# Altium PCB SB2232_v01.PcbDoc
Units mm, origin at the board's own origin, x right, y up, seen from the top; angles counter-clockwise.
Board outline 70 x 25 mm, 2 copper layers (Top Layer, Bottom Layer); 40 components, 39 nets, 158 pads, 116 vias.
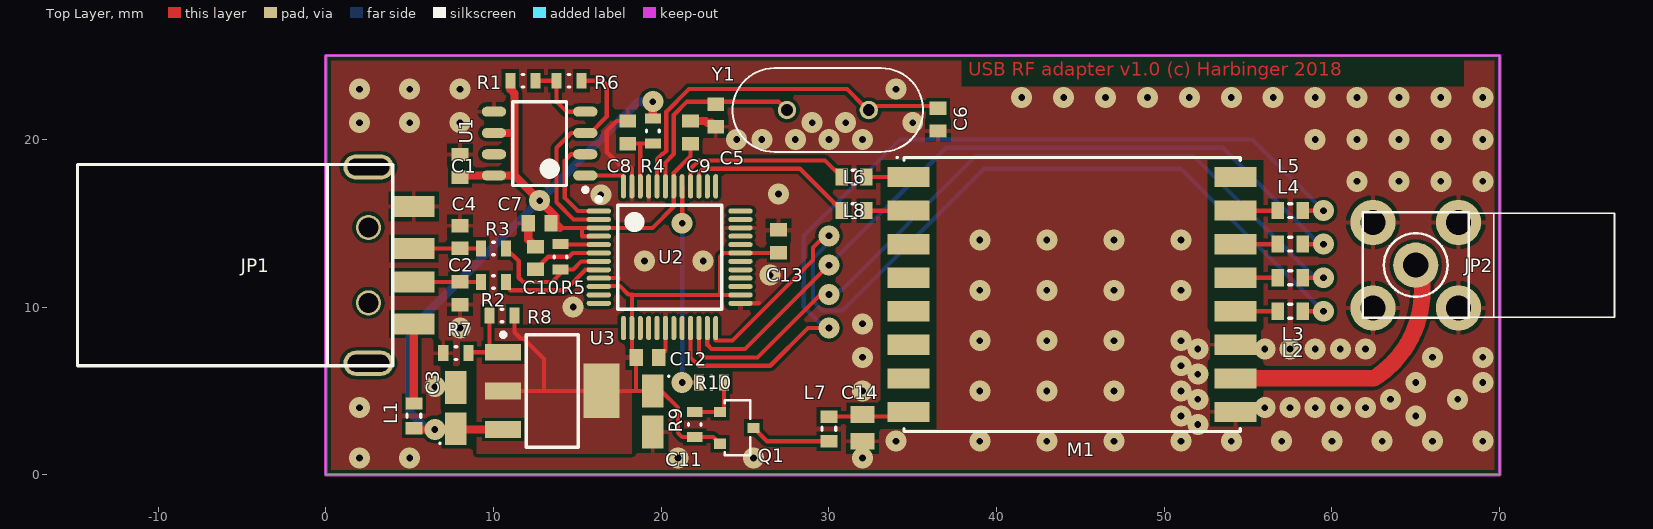
[diagram p0: Top Layer view]
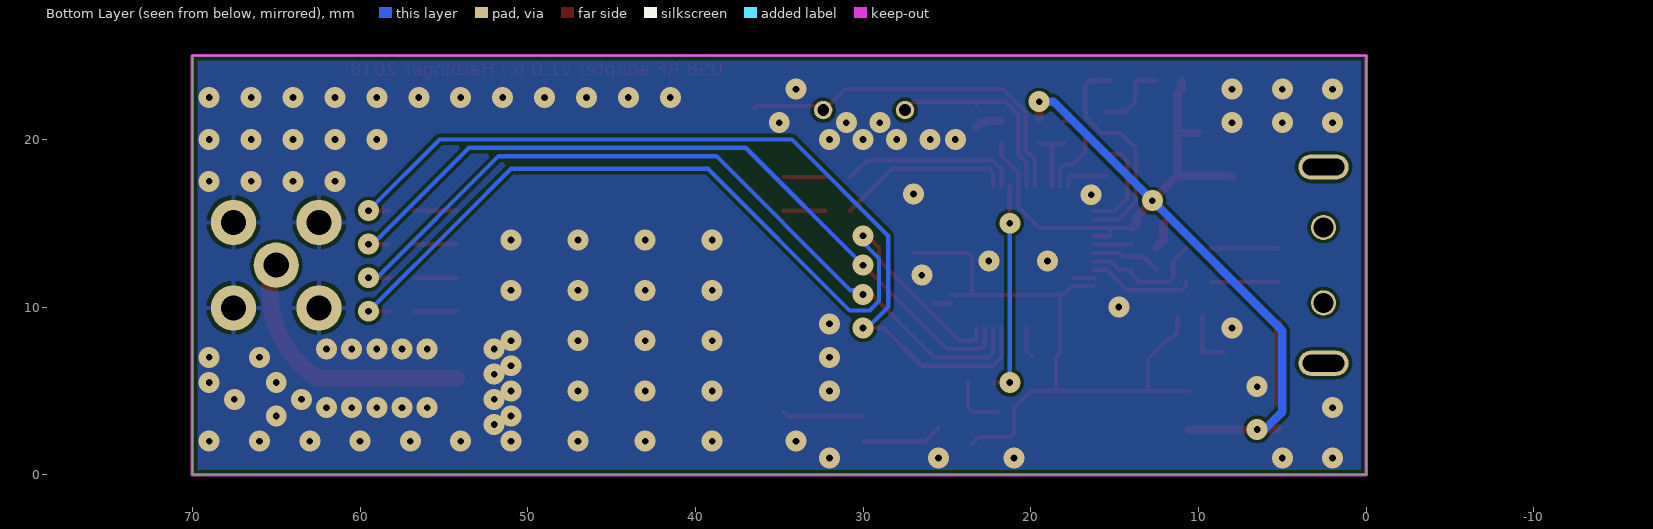
[diagram p1: Bottom Layer view, seen from below]

## Layer stack, top to bottom
Top Solder: solder mask 0.0102, Solder Resist, Dk 3.5
Top Layer: signal copper 0.0356
Dielectric 1: dielectric 0.32, FR-4, Dk 4.8
Bottom Layer: signal copper 0.0356
Bottom Solder: solder mask 0.0102, Solder Resist, Dk 3.5

## Board outline
0,0 0,25 70,25 70,0

## Design rules (kind name [scope] priority, off if disabled: settings)
Clearance Clearance_1 [InNamedPolygon('GND-T1') vs InComponent('M1')] p1: gap=0.4 ignorepadtopadclearanceinfootprint=FALSE
Clearance [All] p2: gap=0.2 ignorepadtopadclearanceinfootprint=FALSE
PolygonConnect PolygonConnect_2 [IsVia vs IsNamedPolygon('GND-T1') Or  IsNamedPolygon('GND-B1')] p1: connectstyle=Direct reliefconductorwidth=0.254 reliefentries=4 polygonreliefangle="90 Angle" airgapwidth=0.254
PolygonConnect PolygonConnect_1 [InComponent('U3') vs IsNamedPolygon('3V3_T')] p2: thpad.connectstyle=Direct thpad.reliefconductorwidth=0.254 thpad.reliefentries=4 thpad.polygonreliefangle="90 Angle" thpad.airgapwidth=0.254 smdpad.connectstyle=Direct smdpad.reliefconductorwidth=0.254 smdpad.reliefentries=4 smdpad.polygonreliefangle="90 Angle" smdpad.airgapwidth=0.254 via.connectstyle=Relief via.reliefconductorwidth=0.254 via.reliefentries=4 via.polygonreliefangle="90 Angle" via.airgapwidth=0.254
PolygonConnect [All] p3: connectstyle=Relief reliefconductorwidth=0.254 reliefentries=4 polygonreliefangle="90 Angle" airgapwidth=0.254
RoutingVias [All] p1: holewidth=0.4 width=0.8 viastyle="Through Hole" minholewidth=0.711 minwidth=1.27 maxholewidth=0.711 maxwidth=1.27
SolderMaskExpansion [All] p1: expansion=0.102
Width [All] p1: maxlimit=3 minlimit=0.2 preferedwidth=0.2
30 further rules are at their usual default settings.

## Components (designator, comment, footprint, x,y, rotation, side; value= is the part's Value field where it differs from the comment)
C1 "100n" CAPC1608X08N 8,18.425 r90 top
C2 "47p" CAPC1608X08N 8,10.825 r270 top
C3 "10u 16V" CAPMP3217X18N 7.75,3.975 r90 top
C4 "47p" CAPC1608X08N 8,14.175 r90 top
C5 "47p" CAPC1608X08N 23.25,21.425 r90 top
C6 "47p" CAPC1608X08N 36.5,21.175 r90 top
C7 "100n" CAPC1608X08N 12.75,15 r180 top
C8 "100n" CAPC1608X08N 18,20.425 r90 top
C9 "100n" CAPC1608X08N 21.75,20.425 r90 top
C10 "47n" CAPC1608X08N 12.5,12.925 r270 top
C11 "10u 16V" CAPMP3217X18N 19.5,3.775 r270 top
C12 "100n" CAPC1608X08N 19.175,7 r0 top
C13 "100n" CAPC1608X08N 27,13.925 r90 top
C14 "10uF" CAPC2012X11N 32,2.8 r270 top
JP1 "USBA-1M" USB_A_M_SMD 5.24,12.5 r90 top locked
JP2 "S-037" S-037_3D 65,12.5 r0 top
L1 "BLM18AG601" INDC1608X10N 5.25,3.515 r270 top
L2 "BLM18AG601" INDC1608X10N 57.515,9.75 r180 top
L3 "BLM18AG601" INDC1608X10N 57.515,11.75 r180 top
L4 "BLM18AG601" INDC1608X10N 57.515,13.75 r180 top
L5 "BLM18AG601" INDC1608X10N 57.515,15.75 r180 top
L6 "BLM18AG601" INDC1608X10N 31.5,17.75 r0 top
L7 "BLM18AG601" INDC1608X10N 30,2.735 r90 top
L8 "BLM18AG601" INDC1608X10N 31.5,15.75 r180 top
M1 "RFM69HW" LGA16_RFM69 44.5,10.75 r0 top
Q1 "IRLML6401" SOT-23 23.5,3.75 r270 top
R1 "10k" RESC1608X06N 11.75,23.5 r180 top
R2 "27" RESC1608X06N 10,11.5 r0 top
R3 "27" RESC1608X06N 10,13.5 r0 top
R4 "470" RESC1608X06N 19.5,20.5 r270 top
R5 "1k5" RESC1608X06N 14,13 r270 top
R6 "2k2" RESC1608X06N 14.5,23.5 r0 top
R7 "0" RESC1608X06N 7.75,7.25 r0 top
R8 "nc" RESC1608X06N 10.5,9.5 r0 top
R9 "10k" RESC1608X06N 22,3 r270 top
R10 "1k" RESC1608X06N 23,5.5 r0 top
U1 "93LC46B" SOIC127P600X175-8N 12.75,19.75 r180 top
U2 "FT2232D" TSQFP50P900X900X160-48N 20.5,12.975 r0 top
U3 "LD1117-3.3" SOT230P700X180-4N 13.5,5 r0 top
Y1 "6MHz" XTAL_HC49P488W45L1117T490H350 29.94,21.75 r180 top

## Footprints (in the part's own frame and the unit in brackets; to place one, negate y for a bottom-side part, rotate by r counter-clockwise, add the part's x,y. Pads: shape width x height; smd on the part's side, far side on the other; paste and mask are expansions set on the pad)
CAPC1608X08N [mm] "Chip Capacitor, 2-Leads, Body 1,60x0,80mm, IPC Medium Density"
  rect 0.8x1 smd: 1(-0.675,0) 2(0.675,0)
  body extent -0.87,-0.48 0.87,0.47, height 0.85
CAPC2012X11N [mm] "Chip Capacitor, 2-Leads, Body 2,00x1,25mm, IPC Medium Density"
  rect 1x1.45 smd: 1(-0.8,0) 2(0.8,0)
  body extent -1.1,-0.72 1.1,0.72, height 1.1
CAPMP3217X18N [mm] "Molded Capacitor, 2-Leads, Body 3,20x1,65mm, IPC Medium Density"
  rect 1.95x1.3 smd: 1(1.225,0) 2(-1.225,0)
  silkscreen extent -2.15,0.9 -2.05,1, body extent -1.7,-0.9 1.7,0.9, height 1.8
INDC1608X10N [mm] "Chip Inductor, 2-Leads, Body 1,60x0,80mm, IPC Medium Density"
  rect 0.74x1.02 smd: 1(-0.735,0) 2(0.735,0)
  silkscreen extent -0.1,-0.41 0.1,0.41, body extent -0.9,-0.5 0.9,0.5, height 1
LGA16_RFM69 [mm] "LGA, 16-Leads, RFM69HW"
  rect 2.5x1.2 smd: 1(-9.75,7) 2(-9.75,5) 3(-9.75,3) 4(-9.75,1) 5(-9.75,-1) 6(-9.75,-3) 7(-9.75,-5) 8(-9.75,-7) 9(9.75,-7) 10(9.75,-5) 11(9.75,-3) 12(9.75,-1) 13(9.75,1) 14(9.75,3) 15(9.75,5) 16(9.75,7)
  silkscreen extent -10.47,-8.17 10.02,8.22, body extent -9.87,-8.03 9.87,8.03, height 2
RESC1608X06N [mm] "Chip Resistor, 2-Leads, Body 1,60x0,82mm, IPC Medium Density"
  rect 0.6x0.95 smd: 1(-0.75,0) 2(0.75,0)
  silkscreen extent -0.05,-0.38 0.05,0.38, body extent -0.85,-0.48 0.85,0.48, height 0.6
S-037_3D [mm]
  round 2.7 hole 1.5: 1(0,0) 2(-2.55,-2.55) 2(-2.55,2.55) 2(2.55,-2.55) 2(2.55,2.55)
  silkscreen extent -3.15,-3.15 11.85,3.15, body extent -2.81,-3.4 9.48,2.9, height 11.5
SOIC127P600X175-8N [mm] "SOIC, 8-Leads, Body 4,90x3,90mm, Pitch 1,27mm, IPC Medium Density"
  oval 1.45x0.6 smd: 1(-2.725,1.905) 2(-2.725,0.635) 3(-2.725,-0.635) 4(-2.725,-1.905) 5(2.725,-1.905) 6(2.725,-0.635) 7(2.725,0.635) 8(2.725,1.905)
  silkscreen extent -2.85,-2.5 1.6,2.88, body extent -3,-2.5 3,2.5, height 1.75
SOT230P700X180-4N [mm] "SOT223, 4-Leads, Body 6,50x7,00mm (avg), Pitch 2,30mm, IPC Medium Density"
  rect 2.15x1 smd: 1(-2.925,2.3) 2(-2.925,0) 3(-2.925,-2.3)
  rect 2.15x3.25 smd: 2(2.925,0)
  silkscreen extent -3.05,-3.35 1.55,3.47, body extent -1.85,-3.35 1.85,3.35, height 1.8
SOT-23 [mm]
  rect 0.6x0.7 smd: 1(0,0) 2(0.95,2) 3(1.9,0)
  silkscreen extent -0.7,0.3 2.6,1.8
TSQFP50P900X900X160-48N [mm] "TSQFP, 48-Leads, Body 7,00x7,00mm, Pitch 0,50mm, IPC Medium Density"
  oval 1.45x0.3 smd: 1(-4.225,2.75) 2(-4.225,2.25) 3(-4.225,1.75) 4(-4.225,1.25) 5(-4.225,0.75) 6(-4.225,0.25) 7(-4.225,-0.25) 8(-4.225,-0.75) 9(-4.225,-1.25) 10(-4.225,-1.75) 11(-4.225,-2.25) 12(-4.225,-2.75) 25(4.225,-2.75) 26(4.225,-2.25) 27(4.225,-1.75) 28(4.225,-1.25) 29(4.225,-0.75) 30(4.225,-0.25) 31(4.225,0.25) 32(4.225,0.75) 33(4.225,1.25) 34(4.225,1.75) 35(4.225,2.25) 36(4.225,2.75)
  oval 0.3x1.45 smd: 13(-2.75,-4.225) 14(-2.25,-4.225) 15(-1.75,-4.225) 16(-1.25,-4.225) 17(-0.75,-4.225) 18(-0.25,-4.225) 19(0.25,-4.225) 20(0.75,-4.225) 21(1.25,-4.225) 22(1.75,-4.225) 23(2.25,-4.225) 24(2.75,-4.225) 37(2.75,4.225) 38(2.25,4.225) 39(1.75,4.225) 40(1.25,4.225) 41(0.75,4.225) 42(0.25,4.225) 43(-0.25,4.225) 44(-0.75,4.225) 45(-1.25,4.225) 46(-1.75,4.225) 47(-2.25,4.225) 48(-2.75,4.225)
  silkscreen extent -4.35,-3.1 3.1,3.57, body extent -3.5,-3.5 3.5,3.5, height 1.6
USB_A_M_SMD [mm] "usb male smd mount"
  oval 1.5x3 hole 1 slot 2.5 at 90 deg: 0(-5.85,2.7) 0(5.85,2.7)
  round 1.5 hole 1.2 unplated mask+0: 0(-2.25,2.7) 0(2.25,2.7)
  rect 1.25x2.5 smd: 1(-3.5,0) 2(-1,0) 3(1,0) 4(3.5,0)
  silkscreen extent -6,1.25 6,20.05
XTAL_HC49P488W45L1117T490H350 [mm] "Crystal, HC-49; 4.88 mm C X 0.45 mm W 11.175 mm L X 4.90 mm T X 3.50 mm H body"
  round 1.1 hole 0.7 paste-1.1: 1(-2.44,0) 2(2.44,0)
  silkscreen extent -5.68,-2.5 5.68,2.5, body extent -5.59,-2.45 5.59,2.45, height 3.5

## Part data
C1 C2 C4 C5 C6 C7 C8 C9 C10 C12 C13 C14: library part CAPN, Вид=Конденсатор, Корпус=Footprint
  C1 C7 C8 C9 C12 C13: Тип=100n
  C2 C4 C5 C6: Тип=47p
  C10: Тип=47n
  C14: Тип=10uF
C3 C11: library part CAPP, Вид=Конденсатор, Корпус=Footprint, Тип="10u 16V"
JP1: library part USB_conn, "USB_connector", Вид=Роз'єм, Корпус=Footprint, Тип=USBA-1M
JP2: library part BNC, "RF Connector", Вид=Роз'єм, Корпус=Footprint, Тип=S-037
L1 L2 L3 L4 L5 L6 L7 L8: library part SUPRESOR, Вид="Ferrite bead", Корпус=Footprint, Тип=BLM18AG601
M1: library part RFM69HW_V13_2, Корпус=Footprint, Тип=RFM69HW
Q1: library part MOSF-P, Вид=Транзистор, Корпус=Footprint, Тип=IRLML6401
R1 R2 R3 R4 R5 R6 R7 R8 R9 R10: library part RES, Вид=Резистор, Корпус=Footprint
  R1 R9: Тип=10k
  R2 R3: Тип=27
  R4: Тип=470
  R5: Тип=1k5
  R6: Тип=2k2
  R7: Тип=0
  R8: Тип=nc
  R10: Тип=1k
U1: library part 93C56, "3-wire EEPROM", Вид=Мікросхема, Корпус=Footprint, Тип=93LC46B
U3: library part LM1117_3.3, Вид=Мікросхема, Корпус=Footprint, Тип=LD1117-3.3
Y1: library part Y, Вид=Кварц, Корпус=Footprint, Тип=6MHz
U2: Вид=Мікросхема, Корпус=Footprint, Тип=FT2232D

## Via types
v1: diameter 1.25, hole 0.4, Top Layer to Bottom Layer, 116 vias

## Nets (pads, with @x,y where several pads share a name; then routed paths per layer and width w, separated by ;. In a path a pad name is that pad's centre, name@x,y a point inside that pad or via, vN(x,y) a via of type N, cw(c..) or ccw(c..) an arc to the next point about the centre after c; other vN are vias at no path point)
+3V3: C11.2 C12.1 C13.1 Q1.3 R8.2 R9.2 U2.10 U2.14 U2.26 U2.31 U3.2 | length 40.8
  Top Layer w0.25: U3.2@10.575,5 13,5 ; R8.2 11.25,8.5 11.625,8.125 11.785,8.125 13,6.91 13,5 ; U2.10 16.3,11.25 17.531,11.25 18.031,10.75 18.25,10.75 ; Q1.3 23.1,2.25 R9.2 21.25,2.25 21,2.5 21,4 20,5 C11.2 18.5,5 ; U2.26 23.5,10.725 ; C13.1 26.975,13.225 U2.31 23.725,13.225 23.5,13 23.5,10.725 ; 13,5 16.425,5 18.5,5 ; 18.25,10.75 18.275,10.725 23.5,10.725 ; 18.25,10.75 U2.14 18.25,7.25 C12.1 18.5,5
AD4: U2.20
AD5: U2.19
AD6: U2.17
AD7: U2.16
GND: C1.2 C2.2 C3.1 C4.2 C5.1 C6.1 C7.2 C8.2 C9.2 C10.1 C11.1 C12.2 C13.2 C14.2 JP1.4 JP2.2 M1.9 M1.11 R7.1 U1.5 U2.9 U2.18 U2.25 U2.34 U2.45 U2.47 | length 13.1
  Top Layer w0.2: C12.2 20.25,7.4 ; C5.1@22.75,21 C5.1@23,21
  Top Layer w0.25: U2.9 17.475,11.725 ; C8.2 17.35,21.1 16.75,20.5 16.75,19.25 17.5,18.5 18,18.5 18.25,18.25 U2.47 ; 20.25,7.4 U2.18 ; U2.25 25.818,10.225
  Top Layer w0.5: C7.2 12.075,14.025 C10.1 ; C9.2 22.65,21.1 C5.1@22.75,21 ; C5.1@23,21 C5.1
  other v1: 2,1 5,1 21,1 25.5,1 32,1 34,2 39,2 43,2 47,2 51,2 54,2 57,2 60,2 63,2 66,2 69,2 52,3 51,3.5 65,3.5 2,4 56,4 57.5,4 59,4 60.5,4 62,4 52,4.5 63.5,4.5 67.5,4.5 32,5 39,5 43,5 47,5 51,5 6.5,5.25 65,5.5 69,5.5 52,6 51,6.5 32,7 66,7 69,7 52,7.5 56,7.5 57.5,7.5 59,7.5 60.5,7.5 62,7.5 39,8 43,8 47,8 51,8 8,8.75 32,9 14.75,10 39,11 43,11 47,11 51,11 26.5,11.9 19,12.75 22.5,12.75 39,14 43,14 47,14 51,14 16.4,16.7 27,16.75 61.5,17.5 64,17.5 66.5,17.5 69,17.5 24.5,20 26,20 28,20 30,20 32,20 59,20 61.5,20 64,20 66.5,20 69,20 2,21 5,21 8,21 29,21 31,21 35,21 41.5,22.5 44,22.5 46.5,22.5 49,22.5 51.5,22.5 54,22.5 56.5,22.5 59,22.5 61.5,22.5 64,22.5 66.5,22.5 69,22.5 2,23 5,23 8,23 34,23
IRQ: L8.2 U2.39 | length 10.5
  Top Layer w0.25: U2.39 22.25,18 22.5,18.25 28.265,18.25 L8.2
MISO: L3.1 U2.22 | length 48.6
  Top Layer w0.25: U2.22 22.25,7.25 22.5,7 25.75,7 29.5,10.75 v1(30,10.75) ; L3.1 v1(59.5,11.75)
  Bottom Layer w0.25: v1(30,10.75) 30,11.25 30.25,11 30.75,11 38.75,19 51.75,19 59,11.75 v1(59.5,11.75)
MOSI: L4.1 U2.23 | length 46.5
  Top Layer w0.25: U2.23 22.75,7.75 23,7.5 25,7.5 v1(30,12.5) ; L4.1 v1(59.5,13.75)
  Bottom Layer w0.25: v1(30,12.5) 37,19.5 53.5,19.5 59.25,13.75 v1(59.5,13.75)
NCS: L5.1 U2.21 | length 53.8
  Top Layer w0.25: U2.21 21.75,7 22.25,6.5 26.5,6.5 28.75,8.75 v1(30,8.75) ; L5.1 v1(59.5,15.75)
  Bottom Layer w0.25: v1(30,8.75) 29.75,8.75 28.5,10 28.5,14.25 34.25,20 55.25,20 v1(59.5,15.75)
NetC2_1: C2.1 JP1.2 R2.1 | length 4
  Top Layer w0.25: JP1.2 C2.1 R2.1
NetC4_1: C4.1 JP1.3 R3.1 | length 4
  Top Layer w0.25: JP1.3 C4.1 R3.1
NetC5_2: C5.2 U2.43 Y1.2 | length 12
  Top Layer w0.25: U2.43 20.25,18.629 20.75,19.129 20.75,21.46 21.54,22.25 C5.2@23.25,22.25 ; C5.2 C5.2@23.25,22.25 ; Y1.2@27.375,21.625 27.375,21.875 27,22.25 C5.2@23.25,22.25
NetC6_2: C6.2 U2.44 Y1.1 | length 21.9
  Top Layer w0.25: U2.44 19.75,18.821 20.054,19.125 20.11,19.125 20.3,19.315 20.3,21.646 21.654,23 31.08,23 32.08,22 36.35,22 C6.2
NetC8_1: C8.1 R4.2 U2.46 | length 4
  Top Layer w0.25: C8.1 18.75,19.75 ; U2.46 18.75,19.75 ; R4.2 18.75,19.75
NetC10_2: C10.2 U2.6 | length 4.2
  Top Layer w0.25: C10.2 12.51,12.25 13.26,13 14.5,13 14.725,13.225 U2.6
NetC14_1: C14.1 L7.2 M1.8 | length 4.9
  Top Layer w0.25: L7.2 34.47,3.47 M1.8
NetJP1_1: JP1.1 L1.1 | length 4.8
  Top Layer w0.25: L1.1@5.24,4.26 L1.1
  Top Layer w0.5: L1.1@5.24,4.26 JP1.1
NetJP2_1: JP2.1 M1.10 | length 15.8
  Top Layer w1: M1.10 62.5,5.75 ccw(c59.21,10.974) JP2.1@65.25,12.25
NetL2_2: L2.2 M1.12 | length 2.5
  Top Layer w0.25: M1.12 L2.2
NetL3_2: L3.2 M1.13 | length 2.5
  Top Layer w0.25: M1.13 L3.2
NetL4_2: L4.2 M1.14 | length 2.5
  Top Layer w0.25: M1.14 L4.2
NetL5_2: L5.2 M1.15 | length 2.5
  Top Layer w0.25: M1.15 L5.2
NetL6_2: L6.2 M1.1 | length 2.5
  Top Layer w0.25: L6.2 M1.1
NetL7_1: L7.1 Q1.2 | length 4.8
  Top Layer w0.25: Q1.2 26.3,2 L7.1
NetL8_1: L8.1 M1.2 | length 2.5
  Top Layer w0.25: L8.1 M1.2
NetQ1_1: Q1.1 R9.1 R10.2 | length 3.4
  Top Layer w0.25: R9.1 Q1.1 23.75,4 R10.2
NetR1_1: R1.1 R6.1 U1.4 | length 4.5
  Top Layer w0.25: R1.1 R6.1 13.75,22.25 14.345,21.655 U1.4
NetR2_2: R2.2 U2.8 | length 6.4
  Top Layer w0.25: R2.2 10.75,11.25 11,11 14.25,11 15.475,12.225 U2.8
NetR3_2: R3.2 R5.2 U2.7 | length 7.3
  Top Layer w0.25: R3.2 11.5,12.75 11.5,11.75 11.75,11.5 13.5,11.5 R5.2@14,12 ; R5.2 14.75,12.25 15.225,12.725 U2.7
NetR5_1: R5.1 U2.5 | length 2.3
  Top Layer w0.25: R5.1 14.025,13.725 U2.5
NetR6_2: R6.2 U1.3 U2.2 | length 13.5
  Top Layer w0.25: R6.2 16.5,23.5 16.75,23.25 16.75,21.359 15.776,20.385 U1.3 14.635,20.385 13.75,19.5 13.75,16.25 14.775,15.225 U2.2
NetR7_2: R7.2 R8.1 U3.1 | length 3.5
  Top Layer w0.25: R7.2 8.55,7.3 9.75,7.3 R8.1
NetU1_1: U1.1 U2.48 | length 2.9
  Top Layer w0.25: U1.1 17.655,17.845 17.75,17.75 U2.48
NetU1_2: U1.2 U2.1 | length 6
  Top Layer w0.25: U1.2 14.615,19.115 14.25,18.75 14.25,16.5 15.025,15.725 U2.1
P\W\R\: R10.1 U2.41 | length 12.7
  Top Layer w0.25: v1(21.25,5.5) R10.1 ; v1(21.25,15) U2.41
  Bottom Layer w0.25: v1(21.25,5.5) v1(21.25,15)
RFRST: L6.1 U2.40 | length 10.7
  Top Layer w0.25: U2.40 21.75,18.25 22.25,18.75 29.765,18.75 L6.1
SCK: L2.1 U2.24 | length 53.8
  Top Layer w0.25: U2.24 23.25,8 24.25,8 29.05,12.8 29.05,13.55 29.75,14.25 v1(30,14.25) ; L2.1 v1(59.5,9.75)
  Bottom Layer w0.25: v1(30,14.25) 30,13.844 29.05,12.894 29.05,10.356 29.606,9.8 30.8,9.8 39.25,18.25 51,18.25 53.75,15.5 v1(59.5,9.75)
V_BUS: C1.1 C3.2 C7.1 C9.1 L1.2 R1.2 R4.1 U1.6 U1.8 U2.3 U2.4 U2.42 U3.3 | length 60.8
  Top Layer w0.25: 13.95,14.725 15.275,14.725 ; U2.4 15.275,14.225 15.275,14.725 ; C9.1 21.75,19 20.75,18 U2.42 20.75,16 19.475,14.725 U2.3 15.275,14.725
  Top Layer w0.5: L1.2 5.33,2.7 v1(6.5,2.7) U3.3 ; C1.1 8.095,17.845 U1.8 11.25,17.845 ; U1.6 11.135,20.385 11.25,20.5 ; R1.2 11,23 11.25,22.75 11.25,20.5 ; 13.95,14.725 13.675,15 13.675,15.42 v1(12.75,16.345) 11.25,17.845 ; R4.1 v1(19.5,22.25) ; 11.25,17.845 11.25,20.5
  Bottom Layer w0.5: v1(6.5,2.7) 6.05,2.7 5,3.75 5,8.595 v1(12.75,16.345) 18.655,22.25 v1(19.5,22.25)
pads on no net: JP1.0 M1.3 M1.4 M1.5 M1.6 M1.7 M1.16 U1.7 U2.11 U2.12 U2.13 U2.15 U2.27 U2.28 U2.29 U2.30 U2.32 U2.33 U2.35 U2.36 U2.37 U2.38

## Polygon pours and split planes (outlines as drawn)
+3V3 on Top Layer "3V3_T" (solid, remove dead copper, pour order 0): 9,8.75 9,1.25 18.25,1.25 18.25,8.75
GND on Top Layer "GND-T1" (solid, remove dead copper, pour order 2): 0,0 70,0 70,25 0,25
GND on Bottom Layer "GND-B1" (solid, remove dead copper, pour order 4): 0,0 70,0 70,25 0,25

## Keep-outs
Keep-Out Layer:
  the board outline again, w0.2

## Other copper
Top Layer:
  text "USB RF adapter v1.0 (c) Harbinger 2018" at 38.3,23.8 h0.8

## Dimensions
0,0 to 70,0 on Mechanical 1
0,0 to 0,25 on Mechanical 1